# Altium PCB NE-CurrentSense-V3.PcbDoc
Units mm, origin at the board's own origin, x right, y up, seen from the top; angles counter-clockwise.
Board outline 98.25 x 80.25 mm, 2 copper layers (Top Layer, Bottom Layer); 45 components, 21 nets, 116 pads, 681 vias.
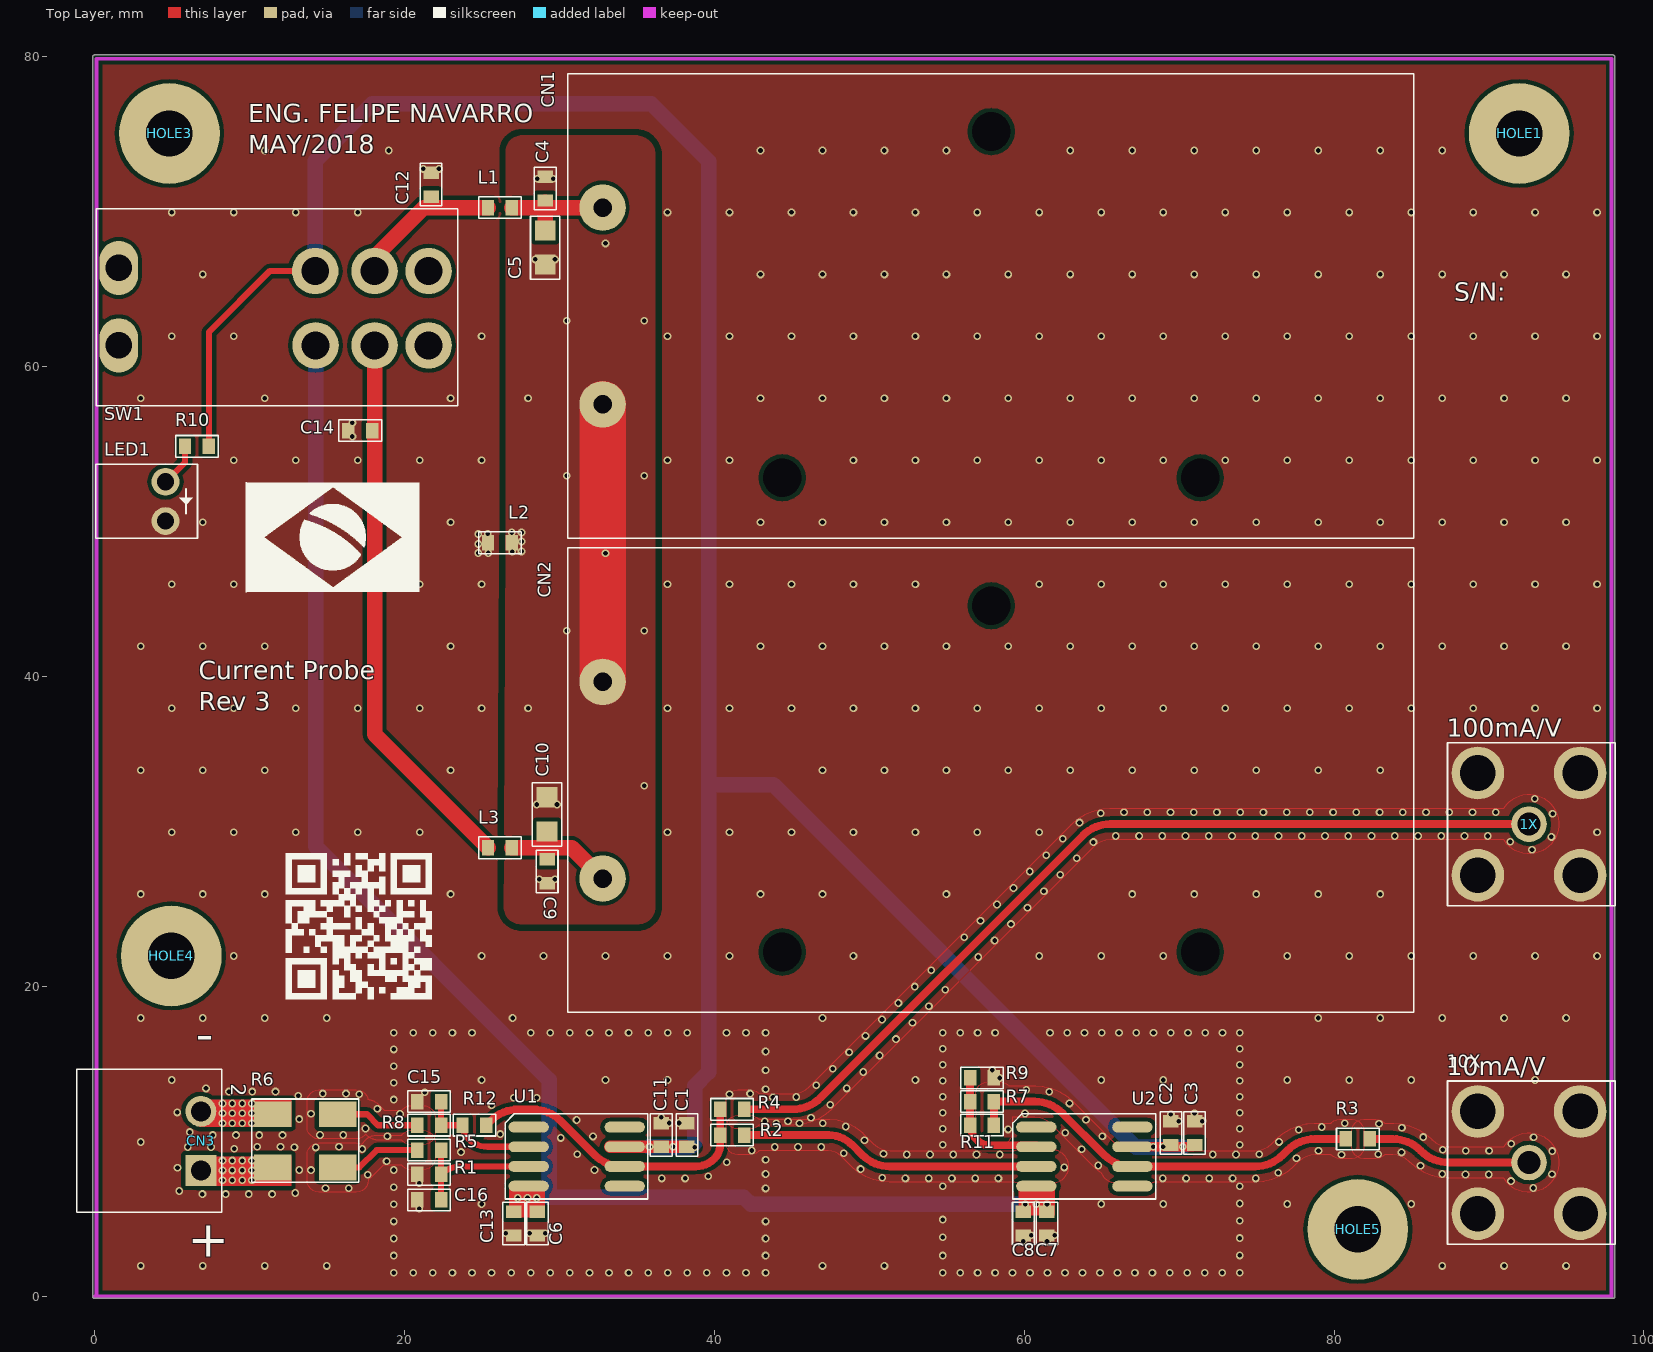
[diagram p0: Top Layer view]
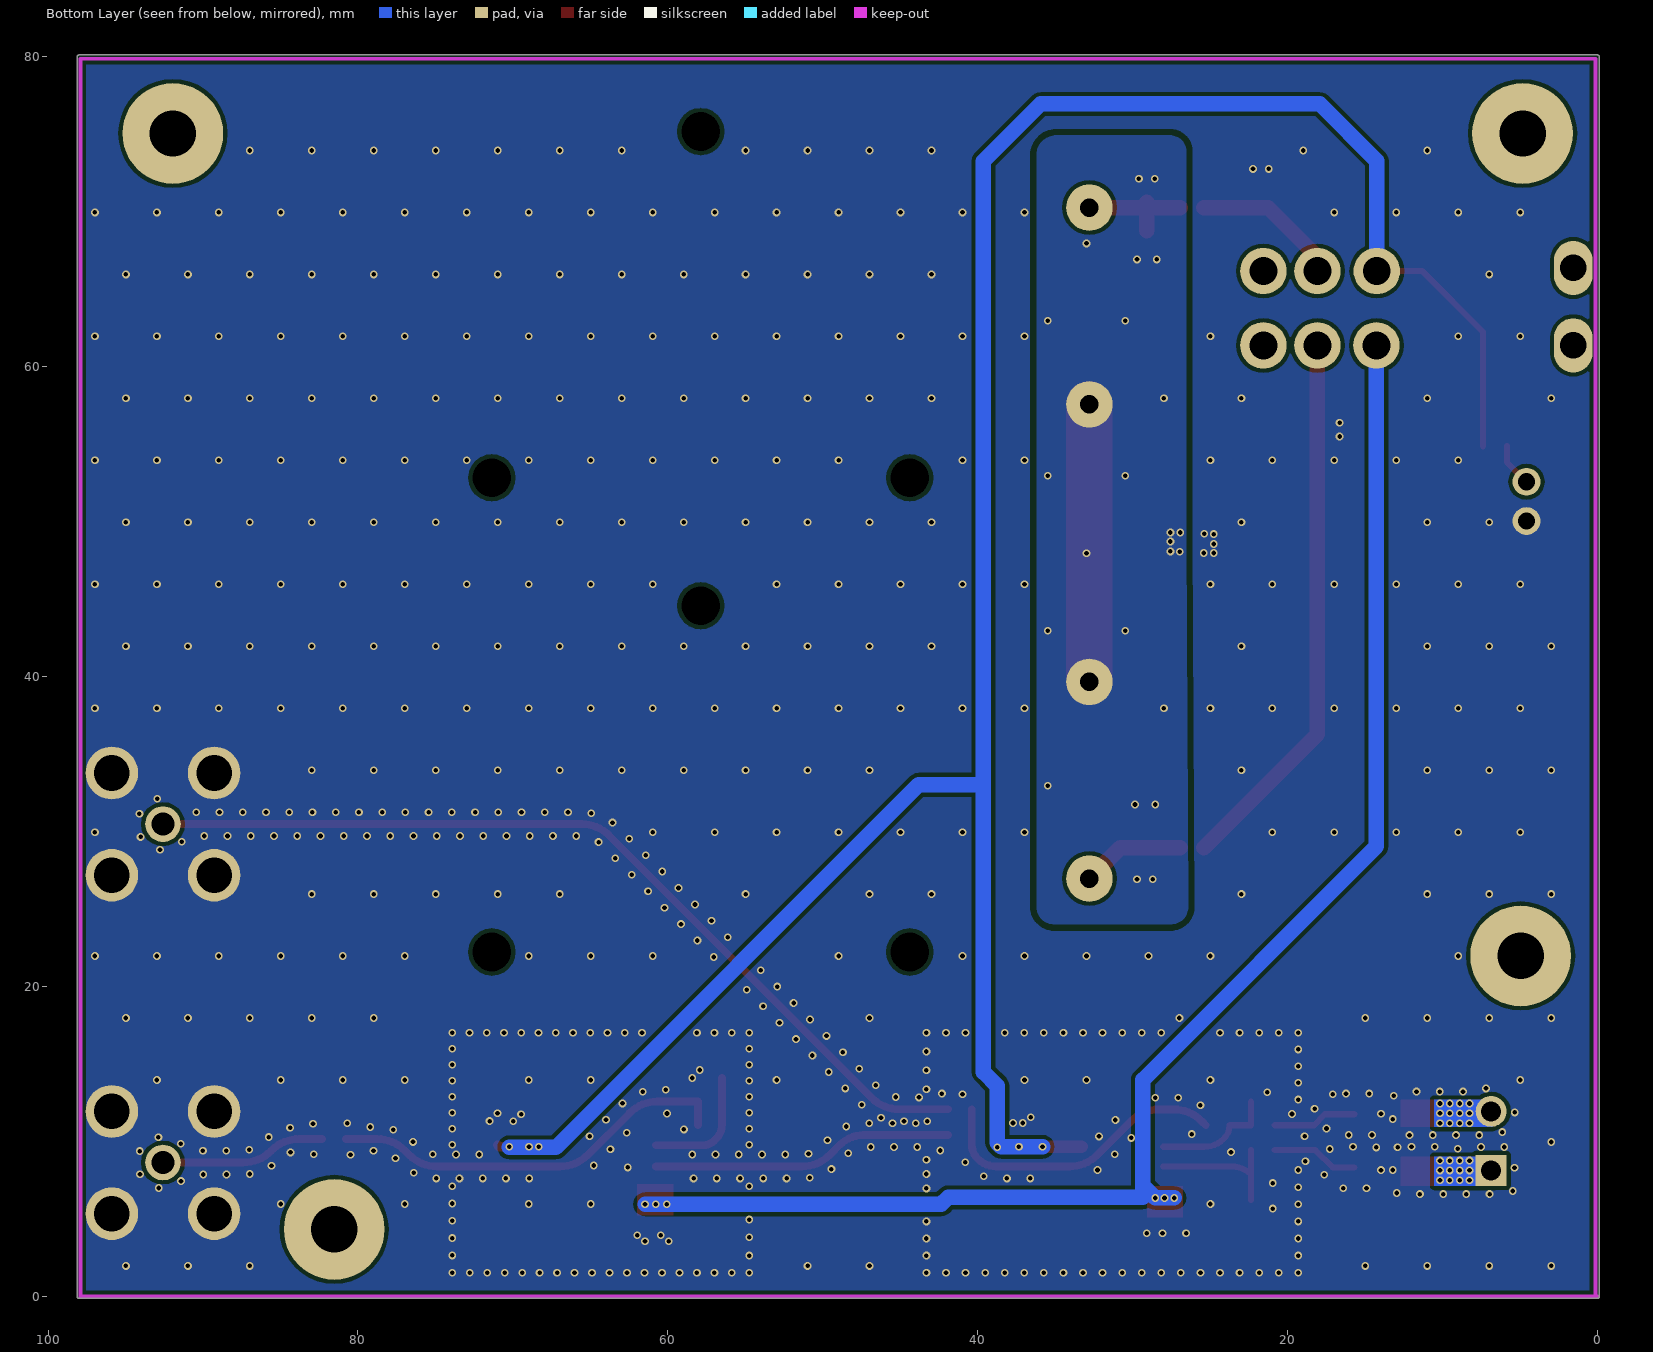
[diagram p1: Bottom Layer view, seen from below]
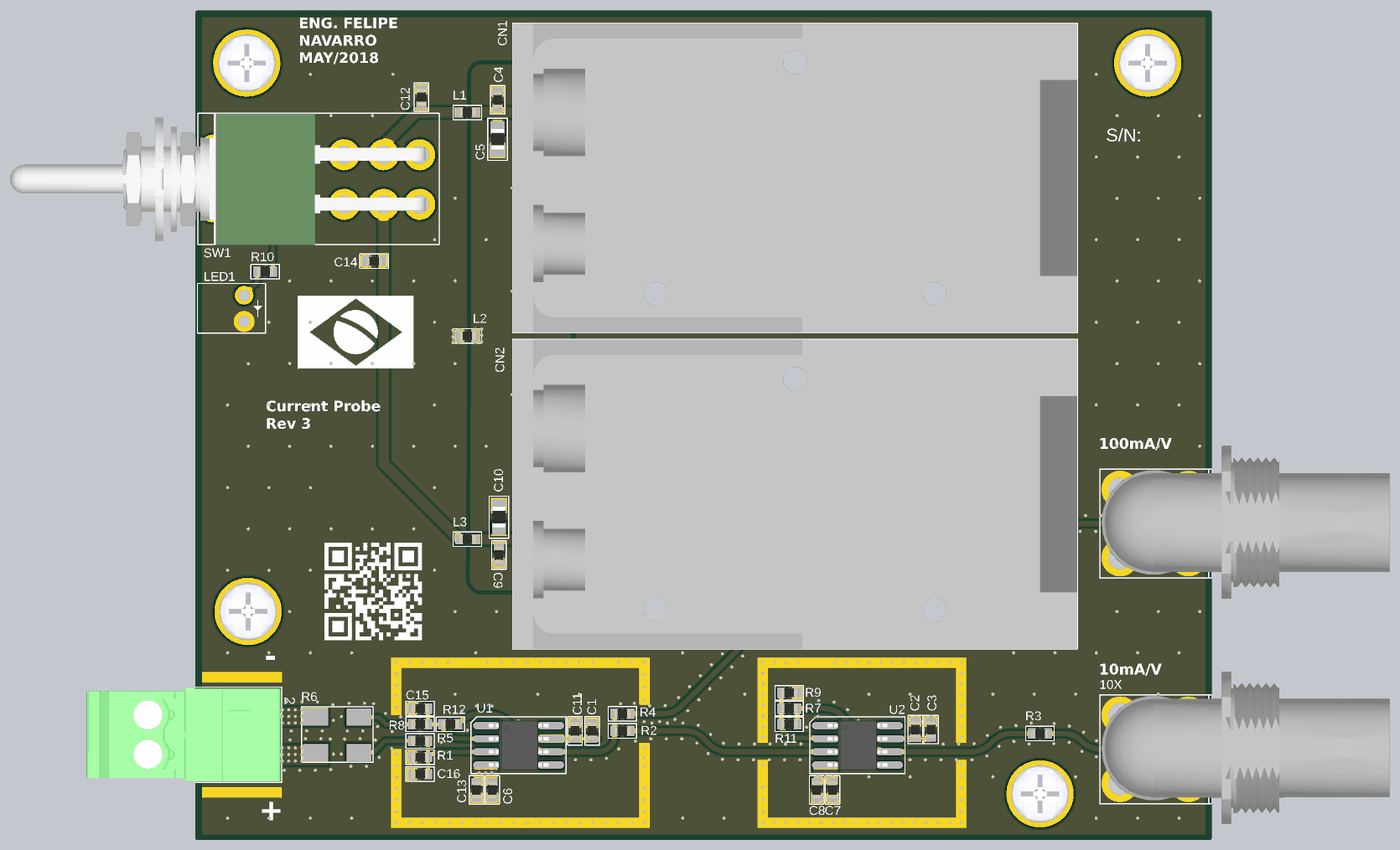
[diagram p2: 3D render of the assembled board from above, using the file's embedded part models]

## Layer stack, top to bottom
Top Solder: solder mask 0.0102, Solder Resist, Dk 3.5
Top Layer: signal copper 0.0356
Dielectric 1: dielectric 0.32, FR-4, Dk 4.8
Bottom Layer: signal copper 0.0356
Bottom Solder: solder mask 0.0102, Solder Resist, Dk 3.5

## Board outline
-0.127,0 ccw(c0,0) 0,-0.127 97.917,-0.127 ccw(c97.917,0) 97.958,-0.12 97.959,-0.12 ccw(c98,0) 98.127,0 98.127,80 ccw(c98,80) 98,80.127 0,80.127 ccw(c0,80) -0.127,80

## Design rules (kind name [scope] priority, off if disabled: settings)
Clearance [InNet('GND') vs InNet('NetC4_1')] p1: gap=0.4 ignorepadtopadclearanceinfootprint=FALSE
Clearance Clearance_1 [All] p2: gap=0.254 ignorepadtopadclearanceinfootprint=FALSE except(0: Arc-Hole Track-Hole SMDPad-Hole THPad-Hole Via-Hole Fill-Hole Poly-Hole Region-Hole Text-Hole)
PolygonConnect [All] p1: connectstyle=Direct reliefconductorwidth=0.254 reliefentries=4 polygonreliefangle="90 Angle" airgapwidth=0.254
RoutingVias [All] p1: holewidth=0.711 width=1.27 viastyle="Through Hole" minholewidth=0.711 minwidth=1.27 maxholewidth=0.711 maxwidth=1.27
SolderMaskExpansion [All] p1: expansion=0.102
Width [All] p1: maxlimit=4 minlimit=0.254 preferedwidth=0.254
30 further rules are at their usual default settings.

## Classes and differential pairs
component class NE-CurrentSense-V3: 1X 10X C1 C4 C5 C6 C9 C10 C11 C12 C13 C14 C15 C16 CN1 CN2 CN3 CN#1 HOLE1 HOLE3 HOLE4 HOLE5 L1 L2 L3 LED1 R1 R2 R3 R5 R6 R7 R8 R9 R10 R11 R12 SW1 U1 U2

## Components (designator, comment, footprint, x,y, rotation, side; value= is the part's Value field where it differs from the comment)
1X "Conn BNC" "CONN BNC-JACK-TE-5-1634556-0" 92.583,30.48 r270 top value="Jack BNC"
10X "Conn BNC" "CONN BNC-JACK-TE-5-1634556-0" 92.583,8.636 r270 top value="Jack BNC"
C1 "Capacitor Cerâmico" CC0603 38.227,10.414 r270 top value=100nF
C2 "Capacitor Cerâmico" CC0603 69.469,10.541 r270 top value=100nF
C3 "Capacitor Cerâmico" CC0603 70.993,10.541 r270 top value=1uF
C4 "Capacitor Cerâmico" CC0603 29.083,71.501 r270 top value=1uF
C5 "Capacitor Cerâmico" CC0805 29.083,67.691 r90 top value=10uF
C6 "Capacitor Cerâmico" CC0603 28.575,4.699 r270 top value=100nF
C7 "Capacitor Cerâmico" CC0603 61.468,4.699 r270 top value=100nF
C8 "Capacitor Cerâmico" CC0603 59.944,4.699 r270 top value=1uF
C9 "Capacitor Cerâmico" CC0603 29.21,27.432 r270 top value=1uF
C10 "Capacitor Cerâmico" CC0805 29.21,31.115 r90 top value=10uF
C11 "Capacitor Cerâmico" CC0603 36.576,10.414 r270 top value=1uF
C12 "Capacitor Cerâmico" CC0603 21.717,71.755 r270 top value=1uF
C13 "Capacitor Cerâmico" CC0603 27.051,4.699 r270 top value=1uF
C14 "Capacitor Cerâmico" CC0603 17.145,55.88 r180 top value=1uF
C15 "Capacitor Cerâmico" CC0603 21.59,12.573 r0 top value=10pF
C16 "Capacitor Cerâmico" CC0603 21.59,6.223 r0 top value=10pF
CN1 "Holder" BATTHOLDER-9V-BH9V-PC-ND 52.07,64.008 r180 top value="Holder 9V BAT"
CN2 "Holder" BATTHOLDER-9V-BH9V-PC-ND 52.07,33.401 r180 top value="Holder 9V BAT"
CN3 "Block" "CONN BLOCK2 RCPT/H" 6.858,8.128 r180 top value="Receptáculo - 2 Polos"
CN#1 "Conector Externo" N/A 121.666,42.799 r90 top value="Plug - 2 Polos"
HOLE1 "Furo de Fixação" Furo_M3 91.948,75.057 r0 top value=M3
HOLE3 "Furo de Fixação" Furo_M3 4.826,75.057 r0 top value=M3
HOLE4 "Furo de Fixação" Furo_M3 4.953,21.971 r0 top value=M3
HOLE5 "Furo de Fixação" Furo_M3 81.534,4.318 r0 top value=M3
L1 "Bead" CC0603 26.162,70.273 r0 top value=100R@100MHz
L2 "Bead" CC0603 26.162,48.641 r0 top value=100R@100MHz
L3 "Bead" CC0603 26.162,28.956 r0 top value=100R@100MHz
LED1 "LED" LED-INDIC 4.572,51.308 r270 top value=Verde
R1 "Resistor" CC0603 21.59,7.874 r180 top value=15K
R2 "Resistor" CC0603 41.148,10.409 r0 top value=100R
R3 "Resistor" CC0603 81.534,10.16 r0 top value=49R9
R4 "Resistor" CC0603 41.148,12.071 r0 top value=49R9
R5 "Resistor" CC0603 21.59,9.441 r0 top value=1K5
R6 "Resistor" "CC2516 - Wide Vishay" 13.589,10.033 r0 top value="1R 1W"
R7 "Resistor Open" CC0603 57.277,12.573 r0 top value=OPEN
R8 "Resistor" CC0603 21.59,11.049 r0 top value=1K5
R9 "Resistor" CC0603 57.277,14.097 r180 top value=470R
R10 "Resistor" CC0603 6.604,54.864 r0 top value=470R
R11 "Resistor" CC0603 57.277,11.055 r0 top value=4K7
R12 "Resistor" CC0603 24.511,11.049 r0 top value=15K
SW1 "M2022SS1W40" "SWITCH TOGGLE DPDT 6A 125V" 11.557,63.881 r0 top value=ON-ON
U1 "OPA211" SOIC-8N 31.115,9.017 r0 top
U2 "OPA211" SOIC-8N 63.881,9.017 r0 top

## Footprints (in the part's own frame and the unit in brackets; to place one, negate y for a bottom-side part, rotate by r counter-clockwise, add the part's x,y. Pads: shape width x height; smd on the part's side, far side on the other; paste and mask are expansions set on the pad)
BATTHOLDER-9V-BH9V-PC-ND [mm]
  round 1.524 hole 2.5 unplated: 0(-19.285,11.175) 0(-5.805,-11.175) 0(7.685,11.175)
  round 3 hole 1.2: 1(19.285,6.435) 2(19.285,-6.265)
  silkscreen extent -33.08,-14.91 21.53,15.06, body extent -33.08,-14.91 21.53,15.06, height 20.7
CC0603 [mm] "Chip Resistor, 2-Leads, Body 1,6x0,8mm, IPC Medium Density"
  rect 0.8x1 smd: 1(-0.77,0) 2(0.77,0)
  silkscreen extent -1.38,-0.7 1.38,0.7, body extent -0.8,-0.42 0.8,0.43, height 0.45
CC0805 [mm] "Chip Resistor, 2-Leads, Body 2,0x1,2mm, IPC Medium Density"
  rect 1.3x1.35 smd: 1(-1.1,0) 2(1.1,0)
  silkscreen extent -2.05,-0.95 2.02,0.95, body extent -1,-0.62 1,0.63, height 0.6
"CC2516 - Wide Vishay" [mm]
  rect 2.41x1.65 smd: 1(-2.095,1.715) 2(2.095,1.715) 3(-2.095,-1.715) 4(2.095,-1.715)
  silkscreen extent -3.46,-2.67 3.45,2.71, body extent -3.18,-2.03 3.18,2.03, height 1.27
"CONN BLOCK2 RCPT/H" [mm] "Conector Shrouded Block. Macho, 2 Pin, Horizontal"
  rect 2x2 hole 1.3: 1(0,0)
  round 2 hole 1.3: 2(0,-3.81)
  silkscreen extent -1.35,-6.52 8,2.7, body extent -1.34,-6.42 17.48,2.59, height 8.6
"CONN BNC-JACK-TE-5-1634556-0" [mm]
  round 2.3 hole 1.5: 1(0,0)
  round 3.4 hole 2.3: 2(-3.3,3.3) 2(-3.3,-3.3) 2(3.3,3.3) 2(3.3,-3.3)
  silkscreen extent -5.26,-5.26 5.28,5.55, body extent -7.51,-5.09 7.29,22.74, height 11.71
Furo_M3 [mm] "Furo metalizado para parafuso M3"
  round 6.5 hole 3 unplated paste+0: X(0,0)
  body extent -2.8,-2.8 2.8,2.8, height 2.38
LED-INDIC [mm]
  round 1.8 hole 1.1: 1(-1.27,0) 2(1.27,0)
  silkscreen extent -2.4,-4.51 2.38,2.07, body extent -2.3,-6.81 2.3,1.95, height 7.3
N/A [mm]
SOIC-8N [mm] "SOIC, 8-Leads, Body 4.9x3.9mm, Pitch 1.27mm, IPC Medium Density"
  oval 2.6x0.7 smd: 1(-3.1,1.905) 2(-3.1,0.635) 3(-3.1,-0.635) 4(-3.1,-1.905) 5(3.1,-1.905) 6(3.1,-0.635) 7(3.1,0.635) 8(3.1,1.905)
  silkscreen extent -4.61,-2.73 4.6,2.76, body extent -2.9,-2.4 2.9,2.4, height 1.75
"SWITCH TOGGLE DPDT 6A 125V" [mm] "Chave Seletora SPDT para SubPanel com angulo lateral. Thru-Hole"
  round 3 hole 1.8: 1(2.7,-2.5) 2(6.51,-2.5) 3(10,-2.5) 4(2.681,2.3) 5(6.51,2.3) 6(10,2.3)
  oval 2.5x3.5 hole 1.7: 7(-10,-2.5) 7(-10,2.5)
  silkscreen extent -11.45,-6.39 11.88,6.31, body extent -29.62,-6.42 10.58,6.28, height 13.5

## Part data
1X 10X: "Conector BNC", Supplier Part Number 1=A97570-ND, ChinesePrice=0,00000, Chinês=----, ComponentLink1Description=Datasheet, ComponentLink1URL=D:\Tecnoclade\Datasheet\!DataMissing.pdf, Supplier 1=Digi-Key
C1 C2 C6 C7: library part "Cap 100nF 25V 0603 X7R", "Capacitor (Semiconductor SIM Model)", Supplier Part Number 1=490-1524-1-ND, Tolerância=±10%, ChinesePrice=0,00246, Chinês=Local, ComponentLink1Description=Datasheet, ComponentLink1URL=D:\Tecnoclade\Datasheet\!DataMissing.pdf, Corrente=*A, Obs=X7R, Potência=*W, Supplier 1=Digi-Key, Tensão=25V
C3 C4 C8 C9 C11 C12 C13 C14: library part "Cap 1uF 50V 0603 X5R", "Capacitor (Semiconductor SIM Model)", Supplier Part Number 1=587-2400-1-ND, Tolerância=±10%, ChinesePrice=0,01100, Chinês=Local, ComponentLink1Description=Datasheet, ComponentLink1URL=D:\Tecnoclade\Datasheet\!DataMissing.pdf, Corrente=*A, Obs=X5R, Potência=*W, Supplier 1=Digi-Key, Tensão=50V
C5 C10: library part "Cap 10uF 25V 0805 X5R", "Capacitor (Semiconductor SIM Model)", Supplier Part Number 1=587-2985-1-ND, Tolerância=±10%, ChinesePrice=0,02620, Chinês=Local, ComponentLink1Description=Datasheet, ComponentLink1URL=D:\Tecnoclade\Datasheet\!DataMissing.pdf, Corrente=*A, Obs=X5R, Potência=*W, Supplier 1=Digi-Key, Tensão=25V
C15 C16: library part "Cap 10pF 50V 0603 NP0 5%", "Capacitor (Semiconductor SIM Model)", Supplier Part Number 1=445-1269-1-ND, Tolerância=±5%, ChinesePrice=0,00180, Chinês=Local, ComponentLink1Description=Datasheet, ComponentLink1URL=D:\Tecnoclade\Datasheet\!DataMissing.pdf, Corrente=*A, Obs=NP0, Potência=*W, Supplier 1=Digi-Key, Tensão=50V
CN1 CN2: library part "BattHolder 9V", Supplier Part Number 1=BH9V-PC-ND, ChinesePrice=0,00000, Chinês=----, ComponentLink1Description=Datasheet, ComponentLink1URL=D:\Tecnoclade\Datasheet\!DataMissing.pdf, Corrente=*A, Supplier 1=Digi-Key, Tensão=*V
CN3: library part "SHRD Block 2P RCPT-H P3.81mm", "Conector Shrouded Block", Supplier Part Number 1=ED2808-ND, ChinesePrice=0,00000, Chinês=----, ComponentLink1Description=Datasheet, ComponentLink1URL=D:\Tecnoclade\Datasheet\!DataMissing.pdf, Corrente=10A, Supplier 1=Digi-Key, Tensão=300V
CN#1: library part "Plug Block 2P 3.81mm", "Conector Plug", Supplier Part Number 1=ED2875-ND, Tolerância="16~26 AWG", ChinesePrice=0,00000, Chinês=----, ComponentLink1Description=Datasheet, ComponentLink1URL=D:\Tecnoclade\Datasheet\!DataMissing.pdf, Corrente=10A, Supplier 1=Digi-Key, Tensão=300V
HOLE1 HOLE3 HOLE4 HOLE5: library part Parafuso, "Furo para parafuso", Supplier Part Number 1=--Del, ChinesePrice=0,00000, Chinês=----, ComponentLink1Description=Datasheet, ComponentLink1URL=D:\Tecnoclade\Datasheet\!DataMissing.pdf, Supplier 1=Digi-Key
L1 L2 L3: library part "Bd 100R@100MHz 0603 2A", Supplier Part Number 1=445-2984-1-ND, Tolerância=±25%, ChinesePrice=0,00000, Chinês=----, ComponentLink1Description=Datasheet, ComponentLink1URL=D:\Tecnoclade\Datasheet\!DataMissing.pdf, Corrente=2A, Obs="Ferrite (0R04)", Substituição=00/00/0000, Supplier 1=Digi-Key
LED1: library part LED2, "Typical RED, GREEN, YELLOW, AMBER GaAs LED", Supplier Part Number 1=754-1297-ND, ChinesePrice=0,00000, Chinês=----, Supplier 1=Digi-Key, VertSimCode="} XXXXX {"
R1 R12: library part "Res 15K 0.1% 0603 1/10W", Supplier Part Number 1=P15KDBCT-ND, Tolerância=±0.1%, ChinesePrice=0,00000, Chinês=-----, ComponentLink1Description=Datasheet, ComponentLink1URL=D:\Tecnoclade\Datasheet\!DataMissing.pdf, Corrente=*A, Obs=±25ppm/ºC, Potência=1/10W, Supplier 1=Digi-Key, Tensão=*V
R2: library part "Res 100R 5% 0603 1/10W", Supplier Part Number 1=RMCF0603JT100RCT-ND, Tolerância=±5%, ChinesePrice=0,00080, Chinês=Local, ComponentLink1Description=Datasheet, ComponentLink1URL=D:\Tecnoclade\Datasheet\!DataMissing.pdf, Corrente=*A, Potência=1/10W, Supplier 1=Digi-Key, Tensão=*V
R3 R4: library part "Res 49R9 1% 0603 1/10W", Supplier Part Number 1=P49.9HCT-ND, Tolerância=±1%, ChinesePrice=0,00089, Chinês=Local, ComponentLink1Description=Datasheet, ComponentLink1URL=D:\Tecnoclade\Datasheet\!DataMissing.pdf, Corrente=*A, Potência=1/10W, Supplier 1=Digi-Key, Tensão=*V
R5 R8: library part "Res 1K5 1% 0603 1/10W", Supplier Part Number 1=311-1.50KHRCT-ND, Tolerância=±1%, ChinesePrice=0,00000, Chinês=----, ComponentLink1Description=Datasheet, ComponentLink1URL=D:\Tecnoclade\Datasheet\!DataMissing.pdf, Corrente=*A, Obs=±100ppm/ºC, Potência=1/10W, Supplier 1=Digi-Key, Tensão=*V
R6: library part "Res 1R 0.1% CC2516-Wide-4W 1W", Supplier Part Number 1=Y1606-1.0B-ND, Tolerância=±*%, ChinesePrice=0,00000, Chinês=----, ComponentLink1Description=Datasheet, ComponentLink1URL=D:\Tecnoclade\Datasheet\!DataMissing.pdf, Corrente=*A, Potência=1/10W, Supplier 1=Digi-Key, Tensão=*V
R7: library part "Res Open 0603", "Resistor", Supplier Part Number 1=--Del, Tolerância=±*%, ChinesePrice=0,00000, Chinês=----, ComponentLink1Description=Datasheet, ComponentLink1URL=D:\Tecnoclade\Datasheet\!DataMissing.pdf, Corrente=*A, Potência=*W, Supplier 1=Digi-Key, Tensão=*V
R9 R10: library part "Res 470R 5% 0603 1/10W", Supplier Part Number 1=RMCF0603JT470RCT-ND, Tolerância=±5%, ChinesePrice=0,00000, Chinês=----, ComponentLink1Description=Datasheet, ComponentLink1URL=D:\Tecnoclade\Datasheet\!DataMissing.pdf, Corrente=*A, Obs=±200ppm/ºC, Potência=1/10W, Supplier 1=Digi-Key, Tensão=*V
R11: library part "Res 4K7 1% 0603 1/10W", Supplier Part Number 1=RMCF0603FT4K70CT-ND, Tolerância=±1%, ChinesePrice=0,00000, Chinês=----, ComponentLink1Description=Datasheet, ComponentLink1URL=D:\Tecnoclade\Datasheet\!DataMissing.pdf, Corrente=*A, Obs=±100ppm/ºC, Potência=1/10W, Supplier 1=Digi-Key, Tensão=*V
SW1: library part SW-DPDT, "Double-Pole, Double-Throw Switch", Supplier Part Number 1=M2022SS1W40-ND, ChinesePrice=1,64000, Chinês=Local, ComponentLink1Description=Datasheet, ComponentLink1URL=D:\Tecnoclade\Datasheet\, Corrente=6A, Supplier 1=Digi-Key, Tensão=125V
U1 U2: "Operational Amplifier", Supplier Part Number 1=296-23403-1-ND, ChinesePrice=0,00000, Chinês=----, ComponentLink1Description=Datasheet, ComponentLink1URL=D:\Tecnoclade\Datasheet\, Supplier 1=Digi-Key

## Via types
v1: diameter 0.5, hole 0.3, Top Layer to Bottom Layer, tented both sides, 681 vias

## Nets (pads, with @x,y where several pads share a name; then routed paths per layer and width w, separated by ;. In a path a pad name is that pad's centre, name@x,y a point inside that pad or via, vN(x,y) a via of type N, cw(c..) or ccw(c..) an arc to the next point about the centre after c; other vN are vias at no path point)
9V_SW: C1.2 C2.2 C3.2 C11.2 R10.2 SW1.4 U1.7 U2.7 | length 167.5
  Top Layer w0.4: R10.2 7.374,62.238 11.317,66.181 SW1.4
  Top Layer w0.6: U2.7 70.874,9.652 C3.2
  Top Layer w0.8: U1.7@33.274,9.652 C1.2@38.227,9.652
  Bottom Layer w1: SW1.4 14.238,73.293 17.907,76.962 35.941,76.962 39.624,73.279 39.624,33.02 ; v1(35.814,9.652) 38.481,9.652 38.735,9.906 38.735,13.589 39.624,14.478 39.624,33.02 ; v1@70.231,9.618 67.217,9.618 43.815,33.02 39.624,33.02
  other v1: 38.735,9.618 37.338,9.652 68.326,9.652 68.961,9.652 70.231,9.652
+9V: C12.2 L1.1 SW1.5 | length 9.6
  Top Layer w1: SW1.5 18.067,67.089 21.251,70.273 L1.1
-9V: C14.1 L3.1 SW1.2 | length 35.5
  Top Layer w1: SW1.2 18.067,36.281 L3.1
-9VSW: C6.1 C7.1 C8.1 C13.1 SW1.1 U1.4 U2.4 | length 95.9
  Bottom Layer w1: SW1.1 14.257,29.053 29.337,13.973 29.337,6.388 41.909,6.388 42.354,5.943 v1(61.468,5.943) ; v1(27.305,6.35) v1(27.94,6.35) v1(28.539,6.35) 29.337,7.148
  other v1: 60.071,5.943 60.77,5.943
GND: 1X.2 10X.2 C1.1 C2.1 C3.1 C6.2 C7.2 C8.2 C11.1 C12.1 C13.2 C14.2 C15.1 C16.1 L2.1 LED1.2 R1.2 R9.1
  other v1: 19.304,1.524 20.567,1.524 21.831,1.524 23.094,1.524 24.357,1.524 25.621,1.524 26.884,1.524 28.147,1.524 29.411,1.524 30.674,1.524 31.937,1.524 33.2,1.524 34.464,1.524 35.727,1.524 36.99,1.524 38.254,1.524 39.517,1.524 39.517,1.524 40.78,1.524 42.044,1.524 43.307,1.524 54.737,1.524 55.865,1.524 56.993,1.524 58.121,1.524 59.249,1.524 60.377,1.524 61.505,1.524 62.633,1.524 63.761,1.524 64.89,1.524 66.018,1.524 67.146,1.524 68.274,1.524 69.402,1.524 70.53,1.524 71.658,1.524 72.786,1.524 73.914,1.524 2.977,1.963 6.977,1.963 10.977,1.963 14.977,1.963 46.977,1.963 50.977,1.963 86.977,1.963 90.977,1.963 94.977,1.963 19.304,2.629 43.307,2.629 54.737,2.629 73.914,2.642 59.944,3.556 61.468,3.556 19.304,3.733 43.307,3.733 73.914,3.759 54.737,3.81 60.452,3.937 61.976,3.937 26.546,4.064 28.067,4.064 29.083,4.064 19.304,4.838 43.307,4.838 73.914,4.877 54.737,4.953 20.955,5.664 19.304,5.943 24.977,5.963 64.977,5.963 68.977,5.963 76.977,5.963 84.977,5.963 73.914,5.994 6.955,6.598 8.455,6.598 9.955,6.598 11.455,6.598 12.953,6.675 5.469,6.803 43.307,6.967 14.905,6.979 16.405,6.979 92.855,6.994 19.304,7.047 54.737,7.112 73.914,7.112 20.955,7.31 91.423,7.439 36.612,7.613 38.112,7.613 52.333,7.613 53.833,7.613 55.333,7.613 56.833,7.613 58.333,7.613 68.95,7.613 70.45,7.613 71.95,7.613 73.45,7.613 74.95,7.612 50.834,7.655 39.606,7.757 17.631,7.845 88.485,7.867 89.985,7.867 94.069,7.875 43.307,7.892 86.985,7.896 76.404,7.98 13.214,8.152 13.965,8.148 19.304,8.152 32.262,8.157 49.442,8.213 5.344,8.298 62.592,8.322 85.581,8.423 64.774,8.448 40.801,8.662 18.846,8.723 43.307,8.817 77.576,8.916 52.419,9.151 53.919,9.151 55.419,9.151 56.919,9.151 58.419,9.151 72.168,9.151 73.668,9.151 80.479,9.146 31.151,9.165 75.168,9.177 82.86,9.177 50.92,9.208 48.346,9.238 84.356,9.289 23.647,9.311 94.078,9.375 78.999,9.391 88.507,9.405 90.007,9.405 42.418,9.415 87.008,9.456 63.706,9.501 9.006,9.531 17.271,9.515 12.896,9.618 14.278,9.615 6.01,9.642 7.51,9.642 10.501,9.657 12.001,9.657 15.777,9.657 43.901,9.64 45.401,9.64 46.901,9.64 54.737,9.779 73.914,9.779 91.439,9.852 2.977,9.963 76.442,9.968 49.692,10.069 30.09,10.225 85.755,10.279 92.878,10.275 32.168,10.322 18.897,10.331 65.047,10.335 7.626,10.408 9.126,10.408 10.626,10.408 12.126,10.408 14.547,10.409 16.047,10.409 26.18,10.472 62.646,10.562 6.139,10.602 58.961,10.776 77.718,10.757 54.737,10.813 73.914,10.813 17.485,10.837 84.378,10.875 79.208,10.929 48.484,10.959 82.901,11.135 37.084,11.184 37.719,11.184 44,11.178 45.5,11.178 47,11.178 80.688,11.174 43.255,11.302 44.755,11.302 69.977,11.303 71.501,11.311 31.107,11.383 63.986,11.396 13.214,11.441 46.238,11.525 36.576,11.557 19.712,11.767 69.469,11.748 13.965,11.792 60.053,11.804 70.993,11.811 54.737,11.847 73.914,11.847 5.34,11.872 18.25,12.102 25.621,12.341 47.484,12.361 62.923,12.454 19.304,12.7 27.044,12.815 28.544,12.819 43.788,12.84 45.288,12.862 54.737,12.881 73.914,12.881 13.146,12.939 17.086,13.048 40.975,13.046 14.722,13.087 16.222,13.087 42.308,13.085 21.311,13.172 8.672,13.214 10.172,13.214 11.672,13.214 61.623,13.202 60.129,13.342 43.307,13.371 7.186,13.422 48.544,13.421 46.577,13.629 19.304,13.779 54.737,13.916 73.914,13.916 4.977,13.963 24.977,13.963 32.977,13.963 36.977,13.963 52.977,13.963 64.977,13.963 68.977,13.963 76.977,13.963 80.977,13.963 84.977,13.963 92.977,13.963 58.42,14.097 49.605,14.482 43.307,14.587 57.943,14.605 47.638,14.689 19.304,14.859 54.737,14.95 73.914,14.95 50.666,15.543 48.699,15.75 43.307,15.802 19.304,15.938 54.737,15.984 73.914,15.984 51.726,16.603 49.759,16.811 19.304,17.018 20.567,17.018 21.831,17.018 23.094,17.018 24.357,17.018 28.147,17.018 29.411,17.018 30.674,17.018 31.937,17.018 33.2,17.018 34.464,17.018 35.727,17.018 36.99,17.018 38.254,17.018 40.78,17.018 42.044,17.018 43.307,17.018 54.737,17.018 55.865,17.018 56.993,17.018 58.121,17.018 61.665,17.018 62.778,17.018 63.892,17.018 65.006,17.018 66.119,17.018 67.233,17.018 68.346,17.018 69.46,17.018 70.573,17.018 71.687,17.018 72.8,17.018 73.914,17.018 52.787,17.664 50.82,17.871 2.977,17.963 6.977,17.963 10.977,17.963 14.977,17.963 26.977,17.963 46.977,17.963 78.977,17.963 82.977,17.963 86.977,17.963 90.977,17.963 94.977,17.963 53.848,18.725 51.881,18.932 54.908,19.785 52.941,19.993 54.002,21.053 57.03,21.907 8.977,21.963 24.977,21.963 28.977,21.963 32.977,21.963 36.977,21.963 40.977,21.963 48.977,21.963 60.977,21.963 64.977,21.963 68.977,21.963 76.977,21.963 80.977,21.963 84.977,21.963 88.977,21.963 92.977,21.963 96.977,21.963 58.09,22.967 56.123,23.175 59.151,24.028 57.184,24.235 60.212,25.089 58.245,25.296 2.977,25.963 6.977,25.963 10.977,25.963 22.977,25.963 42.977,25.963 46.977,25.963 54.977,25.963 66.977,25.963 70.977,25.963 74.977,25.963 78.977,25.963 82.977,25.963 61.272,26.149 59.305,26.356 62.333,27.21 60.366,27.417 63.394,28.271 61.427,28.478 92.778,28.828 64.467,29.318 91.367,29.336 62.487,29.538 94.03,29.655 65.915,29.711 67.415,29.711 68.915,29.711 70.415,29.711 71.915,29.711 73.415,29.711 74.915,29.711 76.415,29.711 77.915,29.711 79.415,29.711 80.915,29.711 82.415,29.711 83.915,29.711 85.415,29.711 86.915,29.711 88.415,29.711 89.915,29.711 4.977,29.963 8.977,29.963 12.977,29.963 16.977,29.963 20.977,29.963 36.977,29.963 40.977,29.963 44.977,29.963 48.977,29.963 52.977,29.963 56.977,29.963 60.977,29.963 96.977,29.963 63.569,30.578 94.105,31.153 64.94,31.187 66.438,31.249 67.938,31.249 69.438,31.249 70.938,31.249 72.438,31.249 73.938,31.249 75.438,31.249 76.938,31.249 78.438,31.249 79.938,31.249 81.438,31.249 82.938,31.249 84.438,31.249 85.938,31.249 87.438,31.249 88.938,31.249 90.438,31.249 92.95,32.11 2.977,33.963 6.977,33.963 10.977,33.963 22.977,33.963 46.977,33.963 50.977,33.963 54.977,33.963 58.977,33.963 62.977,33.963 66.977,33.963 70.977,33.963 74.977,33.963 78.977,33.963 82.977,33.963 4.977,37.963 8.977,37.963 12.977,37.963 16.977,37.963 20.977,37.963 24.977,37.963 36.977,37.963 40.977,37.963 44.977,37.963 48.977,37.963 52.977,37.963 56.977,37.963 60.977,37.963 64.977,37.963 68.977,37.963 72.977,37.963 76.977,37.963 80.977,37.963 84.977,37.963 88.977,37.963 92.977,37.963 96.977,37.963 2.977,41.963 6.977,41.963 10.977,41.963 22.977,41.963 42.977,41.963 46.977,41.963 50.977,41.963 54.977,41.963 58.977,41.963 62.977,41.963 66.977,41.963 70.977,41.963 74.977,41.963 78.977,41.963 82.977,41.963 86.977,41.963 90.977,41.963 94.977,41.963 4.977,45.963 8.977,45.963 12.977,45.963 16.977,45.963 20.977,45.963 24.977,45.963 36.977,45.963 40.977,45.963 44.977,45.963 48.977,45.963 52.977,45.963 60.977,45.963 64.977,45.963 68.977,45.963 72.977,45.963 76.977,45.963 80.977,45.963 84.977,45.963 88.977,45.963 92.977,45.963 96.977,45.963 24.765,47.981 25.404,47.981 24.765,48.565 24.765,49.2 25.375,49.225 6.977,49.963 10.977,49.963 22.977,49.963 42.977,49.963 46.977,49.963 50.977,49.963 54.977,49.963 58.977,49.963 62.977,49.963 66.977,49.963 70.977,49.963 74.977,49.963 78.977,49.963 82.977,49.963 86.977,49.963 90.977,49.963 94.977,49.963 8.977,53.963 12.977,53.963 16.977,53.963 20.977,53.963 24.977,53.963 36.977,53.963 40.977,53.963 48.977,53.963 52.977,53.963 56.977,53.963 60.977,53.963 64.977,53.963 68.977,53.963 72.977,53.963 76.977,53.963 80.977,53.963 84.977,53.963 88.977,53.963 92.977,53.963 96.977,53.963 16.637,55.499 16.637,56.388 2.977,57.963 10.977,57.963 22.977,57.963 42.977,57.963 46.977,57.963 50.977,57.963 54.977,57.963 58.977,57.963 62.977,57.963 66.977,57.963 70.977,57.963 74.977,57.963 78.977,57.963 82.977,57.963 86.977,57.963 90.977,57.963 94.977,57.963 4.977,61.963 8.977,61.963 24.977,61.963 36.977,61.963 40.977,61.963 44.977,61.963 48.977,61.963 52.977,61.963 56.977,61.963 60.977,61.963 64.977,61.963 68.977,61.963 72.977,61.963 76.977,61.963 80.977,61.963 84.977,61.963 88.977,61.963 92.977,61.963 96.977,61.963 6.977,65.963 42.977,65.963 46.977,65.963 50.977,65.963 54.977,65.963 58.977,65.963 62.977,65.963 66.977,65.963 70.977,65.963 74.977,65.963 78.977,65.963 82.977,65.963 86.977,65.963 90.977,65.963 94.977,65.963 4.977,69.963 8.977,69.963 12.977,69.963 16.977,69.963 36.977,69.963 40.977,69.963 44.977,69.963 48.977,69.963 52.977,69.963 56.977,69.963 60.977,69.963 64.977,69.963 68.977,69.963 72.977,69.963 76.977,69.963 80.977,69.963 84.977,69.963 88.977,69.963 92.977,69.963 96.977,69.963 21.209,72.771 22.225,72.771 10.977,73.963 18.977,73.963 42.977,73.963 46.977,73.963 50.977,73.963 54.977,73.963 62.977,73.963 66.977,73.963 70.977,73.963 74.977,73.963 78.977,73.963 82.977,73.963 86.977,73.963
Net1X_1: 1X.1 R4.2 | length 58.1
  Top Layer w0.5: R4.2 45.055,12.071 ccw(c45.055,14.611) 46.851,12.815 63.772,29.736 cw(c65.568,27.94) 65.568,30.48 1X.1
Net10X_1: 10X.1 R3.2 | length 10.7
  Top Layer w0.5: R3.2 83.784,10.16 cw(c83.784,7.62) 85.58,9.416 85.616,9.38 ccw(c87.412,11.176) 87.412,8.636 10X.1
NetC4_1: C4.1 C5.1 C9.2 C10.2 CN1.1 CN2.2 L2.2 | length 17.9
  Top Layer w3: CN2.2 CN1.1
  other v1: 28.702,26.924 29.718,26.924 28.539,31.75 29.845,31.75 35.477,32.963 27.977,37.963 30.477,42.963 35.477,42.963 32.977,47.963 26.949,48.057 27.559,48.082 27.559,48.717 26.92,49.301 27.559,49.301 30.477,52.963 35.477,52.963 27.977,57.963 30.477,62.963 35.477,62.963 28.448,66.929 29.718,66.929 32.977,67.963 28.575,72.136 29.591,72.136
NetC4_2: C4.2 C5.2 CN1.2 L1.2 | length 7.7
  Top Layer w1: L1.2 29.083,70.273 ; C5.2 29.083,70.273 ; C4.2@29.083,70.604 29.083,70.273 ; CN1.2 29.083,70.273
NetC9_1: C9.1 C10.1 CN2.1 L3.2 | length 6.7
  Top Layer w1: L3.2 30.795,28.956 CN2.1
NetC15_2: C15.2 R8.2 R12.1 U1.2 | length 7.9
  Top Layer w0.4: C15.2 R8.2 R12.1 ccw(c24.948,11.049) 24.095,10.195 24.13,10.16 ccw(c25.356,11.386) 25.356,9.652 U1.2
NetC16_2: C16.2 R1.1 R5.2 U1.3 | length 9
  Top Layer w0.4: C16.2 R1.1 ; R5.2 R1.1 ; U1.3 23.586,8.382 ccw(c23.586,6.648) R1.1
NetCN3_1: CN3.1 R6.3 | length 0.3
  Top Layer w1.5: CN3.1 cw(c7.048,8.128) CN3.1@7.048,8.318
  other v1: 8.255,7.493 8.89,7.493 9.525,7.493 10.16,7.493 8.255,8.128 8.89,8.128 9.525,8.128 10.16,8.128 8.255,8.763 8.89,8.763 9.525,8.763 10.16,8.763
NetCN3_2: CN3.2 R6.1 | length 0.3
  Top Layer w1.5: CN3.2 ccw(c7.048,11.938) CN3.2@7.048,11.748
  other v1: 8.255,11.176 8.89,11.176 9.525,11.176 10.16,11.176 8.255,11.811 8.89,11.811 9.525,11.811 10.16,11.811 8.255,12.446 8.89,12.446 9.525,12.446 10.16,12.446
NetLED1_1: LED1.1 R10.1 | length 2.8
  Top Layer w0.4: LED1.1 5.834,53.84 R10.1
NetR2_1: R2.1 R4.1 R12.2 U1.6 | length 19.8
  Top Layer w0.5: R12.2 25.553,11.321 cw(c27.349,9.525) 27.349,12.065 28.286,12.065 cw(c28.286,9.525) 30.082,11.321 32.277,9.126 ccw(c34.073,10.922) 34.073,8.382 U1.6 38.779,8.382 ccw(c38.779,10.116) 40.005,8.89 ccw(c39.105,9.79) 40.378,9.79 R4.1
NetR2_2: R2.2 U2.3 | length 19.5
  Top Layer w0.5: R2.2 47.373,10.409 cw(c47.373,8.257) 48.895,9.779 49.548,9.126 ccw(c51.344,10.922) 51.344,8.382 U2.3
NetR3_1: R3.1 R7.2 R11.2 U2.6 | length 26.3
  Top Layer w0.5: R11.2 R7.2 60.67,12.573 cw(c60.67,10.033) 62.466,11.829 65.169,9.126 ccw(c66.965,10.922) 66.965,8.382 U2.6 74.894,8.382 ccw(c74.894,10.922) 76.69,9.126 76.98,9.416 cw(c78.776,7.62) 78.776,10.16 R3.1
NetR5_1: R5.1 R6.4 | length 5.6
  Top Layer w0.4: R6.4 17.089,8.318 18.212,9.441 R5.1
NetR6_2: R6.2 R8.1 | length 5.4
  Top Layer w0.4: R6.2 17.589,11.748 18.288,11.049 R8.1
NetR7_1: R7.1 R9.2 R11.1 U2.2 | length 8
  Top Layer w0.5: R9.2 R7.1 R11.1 ccw(c57.728,11.055) 56.865,10.191 57.023,10.033 ; 57.03,10.026 ccw(c57.673,10.67) 57.673,9.76 ; 57.673,9.752 U2.2@60.78,9.752
pads on no net: CN1.0 CN2.0 HOLE1.X HOLE3.X HOLE4.X HOLE5.X SW1.3 SW1.6 SW1.7 U1.1 U1.5 U1.8 U2.1 U2.5 U2.8

## Polygon pours and split planes (outlines as drawn)
NetC4_1 on Top Layer "Top Layer-No Net 1" (solid, pour order 0): 26.543,48.895 26.543,73.914 cw(c27.559,73.914) 27.559,74.93 34.925,74.93 cw(c34.925,73.66) 36.195,73.66 36.195,25.146 cw(c35.052,25.146) 35.052,24.003 27.559,24.003 cw(c27.559,25.146) 26.416,25.146
GND on Top Layer "Top Layer-No Net 1" (solid, pour order 8): 0.127,79.883 97.917,79.883 97.917,0 97.79,0.127 0.127,0.127
GND on Top Layer "Top Layer-GND" (solid, pour order 12): 17.087,13.313 17.272,13.236 17.43,13.114 17.552,12.956 17.629,12.771 17.636,12.716 17.639,12.716 17.688,12.706 17.738,12.703 17.816,12.687 17.864,12.671 17.913,12.661 17.958,12.639 18.006,12.623 18.047,12.595 18.092,12.573 18.159,12.529 18.196,12.496 18.238,12.468 18.255,12.449 18.275,12.434 18.69,12.019 19.824,12.019 19.879,12.09 20.037,12.212 20.222,12.289 20.42,12.315 21.22,12.315 21.418,12.289 21.603,12.212 21.761,12.09 21.883,11.932 21.96,11.747 21.986,11.549 21.986,10.549 21.96,10.351 21.883,10.166 21.761,10.008 21.603,9.886 21.418,9.809 21.22,9.783 20.42,9.783 20.222,9.809 20.037,9.886 19.879,10.008 19.824,10.079 18.288,10.079 18.263,10.083 18.238,10.081 18.189,10.091 18.139,10.094 18.061,10.11 18.013,10.126 18.004,10.128 17.964,10.136 17.919,10.158 17.871,10.174 17.83,10.202 17.785,10.224 17.762,10.239 17.718,10.268 17.711,10.275 17.681,10.301 17.639,10.329 17.622,10.348 17.602,10.363 17.497,10.469 17.43,10.382 17.272,10.26 17.087,10.183 16.889,10.157 14.479,10.157 14.281,10.183 14.096,10.26 13.938,10.382 13.816,10.54 13.739,10.725 13.713,10.923 13.713,12.573 13.739,12.771 13.816,12.956 13.938,13.114 14.096,13.236 14.281,13.313 14.479,13.339 16.889,13.339
GND on Top Layer "Top Layer-GND 1" (solid, pour order 14): 21.418,10.681 21.603,10.604 21.761,10.482 21.883,10.324 21.96,10.139 21.986,9.941 21.986,8.941 21.96,8.743 21.883,8.558 21.761,8.4 21.603,8.278 21.418,8.201 21.22,8.175 20.42,8.175 20.222,8.201 20.037,8.278 19.879,8.4 19.824,8.471 18.614,8.471 17.775,7.632 17.755,7.617 17.738,7.598 17.696,7.57 17.659,7.537 17.655,7.535 17.655,7.493 17.629,7.295 17.552,7.11 17.43,6.952 17.272,6.83 17.087,6.753 16.889,6.727 14.479,6.727 14.281,6.753 14.096,6.83 13.938,6.952 13.816,7.11 13.739,7.295 13.713,7.493 13.713,9.143 13.739,9.341 13.816,9.526 13.938,9.684 14.096,9.806 14.281,9.883 14.479,9.909 16.889,9.909 17.087,9.883 17.225,9.825 17.526,10.127 17.546,10.142 17.563,10.161 17.605,10.189 17.615,10.197 17.642,10.222 17.675,10.243 17.709,10.266 17.754,10.288 17.795,10.316 17.843,10.332 17.888,10.354 17.889,10.355 17.937,10.364 17.985,10.38 18.063,10.396 18.113,10.399 18.162,10.409 18.187,10.407 18.212,10.411 19.824,10.411 19.879,10.482 20.037,10.604 20.222,10.681 20.42,10.707 21.22,10.707
GND on Top Layer "Top Layer-GND 2" (solid, pour order 16): 92.683,32.399 92.983,32.36 93.176,32.308 93.456,32.192 93.556,32.134 93.629,32.092 93.869,31.908 94.011,31.766 94.195,31.526 94.253,31.426 94.295,31.353 94.411,31.073 94.462,30.88 94.502,30.58 94.502,30.38 94.462,30.08 94.411,29.887 94.295,29.607 94.237,29.507 94.195,29.434 94.011,29.194 93.869,29.052 93.629,28.868 93.529,28.81 93.456,28.768 93.176,28.652 92.983,28.601 92.683,28.561 92.483,28.561 92.183,28.601 91.99,28.652 91.71,28.768 91.61,28.826 91.537,28.868 91.297,29.052 91.155,29.194 90.971,29.434 90.956,29.46 65.573,29.46 65.272,29.43 64.987,29.343 64.724,29.203 64.49,29.011 47.593,12.113 47.575,12.091 47.551,12.072 47.531,12.05 47.197,11.765 47.147,11.732 47.1,11.694 46.725,11.465 46.671,11.44 46.618,11.41 46.213,11.242 46.155,11.226 46.098,11.205 45.671,11.102 45.612,11.096 45.553,11.084 45.115,11.049 45.085,11.051 45.055,11.047 45.027,11.05 42.875,11.05 42.859,11.03 42.701,10.908 42.516,10.831 42.318,10.805 41.518,10.805 41.32,10.831 41.135,10.908 40.977,11.03 40.855,11.188 40.778,11.373 40.752,11.571 40.752,12.571 40.778,12.769 40.855,12.954 40.977,13.112 41.135,13.234 41.32,13.311 41.518,13.337 42.318,13.337 42.516,13.311 42.701,13.234 42.859,13.112 42.875,13.092 45.05,13.092 45.351,13.121 45.636,13.208 45.899,13.348 46.133,13.54 63.03,30.438 63.048,30.46 63.072,30.479 63.092,30.501 63.426,30.786 63.476,30.819 63.523,30.857 63.898,31.086 63.953,31.111 64.005,31.141 64.41,31.309 64.468,31.325 64.525,31.346 64.952,31.449 65.011,31.455 65.07,31.468 65.508,31.502 65.538,31.5 65.568,31.504 65.597,31.501 90.956,31.501 90.971,31.526 91.155,31.766 91.297,31.908 91.537,32.092 91.637,32.15 91.71,32.192 91.99,32.308 92.183,32.36 92.483,32.399 92.683,32.399
GND on Top Layer "Top Layer-GND 3" (solid, pour order 18): 82.902,11.4 83.087,11.323 83.245,11.201 83.261,11.181 83.756,11.181 83.784,11.184 83.814,11.18 83.844,11.182 84.282,11.147 84.341,11.135 84.4,11.129 84.827,11.026 84.884,11.005 84.942,10.989 85.347,10.821 85.4,10.791 85.454,10.766 85.829,10.537 85.876,10.499 85.926,10.466 86.26,10.181 86.28,10.159 86.304,10.14 86.322,10.118 86.334,10.105 86.568,9.913 86.831,9.773 87.116,9.686 87.417,9.657 90.956,9.657 90.958,9.66 90.971,9.682 91.155,9.922 91.297,10.064 91.537,10.248 91.637,10.306 91.71,10.348 91.99,10.464 92.183,10.516 92.483,10.555 92.683,10.555 92.983,10.516 93.176,10.464 93.456,10.348 93.556,10.29 93.629,10.248 93.869,10.064 94.011,9.922 94.195,9.682 94.253,9.582 94.295,9.509 94.411,9.229 94.462,9.036 94.502,8.736 94.502,8.536 94.462,8.236 94.411,8.043 94.295,7.763 94.237,7.663 94.195,7.59 94.011,7.35 93.869,7.208 93.629,7.024 93.529,6.966 93.456,6.924 93.176,6.808 92.983,6.757 92.683,6.717 92.483,6.717 92.183,6.757 91.99,6.808 91.71,6.924 91.61,6.982 91.537,7.024 91.297,7.208 91.155,7.35 90.971,7.59 90.956,7.616 87.44,7.616 87.412,7.612 87.382,7.616 87.352,7.614 86.914,7.649 86.855,7.661 86.795,7.667 86.368,7.77 86.312,7.792 86.254,7.807 85.848,7.975 85.796,8.005 85.741,8.03 85.367,8.259 85.32,8.297 85.27,8.33 84.936,8.615 84.916,8.637 84.892,8.656 84.874,8.678 84.862,8.691 84.628,8.883 84.365,9.023 84.08,9.11 83.779,9.139 83.261,9.139 83.245,9.119 83.087,8.997 82.902,8.92 82.704,8.894 81.904,8.894 81.706,8.92 81.521,8.997 81.363,9.119 81.241,9.277 81.164,9.462 81.138,9.66 81.138,10.66 81.164,10.858 81.241,11.043 81.363,11.201 81.521,11.323 81.706,11.4 81.904,11.426 82.704,11.426
GND on Top Layer "Top Layer-GND 4" (solid, pour order 20): 42.516,11.649 42.701,11.572 42.859,11.451 42.875,11.43 47.322,11.43 47.373,11.436 47.411,11.432 47.448,11.433 47.919,11.386 47.992,11.369 48.067,11.357 48.519,11.22 48.588,11.189 48.658,11.162 49.075,10.939 49.136,10.896 49.2,10.856 49.566,10.556 49.591,10.528 49.621,10.505 49.653,10.465 50.266,9.851 50.5,9.659 50.763,9.519 51.048,9.432 51.349,9.403 59.368,9.403 59.403,9.414 59.448,9.437 59.498,9.446 59.545,9.463 59.682,9.49 59.757,9.495 59.831,9.504 61.731,9.504 61.805,9.495 61.88,9.49 62.017,9.463 62.064,9.446 62.114,9.437 62.159,9.414 62.206,9.398 62.248,9.37 62.293,9.348 62.409,9.271 62.446,9.238 62.488,9.21 62.521,9.172 62.559,9.139 62.587,9.097 62.62,9.06 62.697,8.944 62.719,8.899 62.747,8.857 62.763,8.81 62.786,8.765 62.795,8.715 62.812,8.668 62.839,8.531 62.842,8.481 62.852,8.432 62.849,8.382 62.852,8.332 62.842,8.283 62.839,8.233 62.812,8.096 62.795,8.049 62.786,7.999 62.763,7.954 62.747,7.907 62.719,7.865 62.697,7.82 62.62,7.704 62.587,7.667 62.559,7.625 62.521,7.592 62.488,7.554 62.446,7.526 62.409,7.493 62.293,7.416 62.248,7.394 62.206,7.366 62.159,7.35 62.114,7.327 62.064,7.318 62.017,7.301 61.88,7.274 61.805,7.269 61.731,7.26 59.831,7.26 59.757,7.269 59.682,7.274 59.545,7.301 59.498,7.318 59.448,7.327 59.403,7.35 59.368,7.361 51.372,7.361 51.344,7.358 51.314,7.362 51.284,7.36 50.846,7.395 50.787,7.407 50.728,7.413 50.301,7.516 50.244,7.537 50.186,7.553 49.781,7.721 49.728,7.751 49.674,7.776 49.299,8.005 49.252,8.043 49.202,8.076 48.868,8.361 48.848,8.383 48.824,8.402 48.806,8.424 48.19,9.04 48.001,9.196 47.805,9.3 47.594,9.365 47.349,9.389 42.875,9.389 42.859,9.368 42.701,9.246 42.516,9.17 42.318,9.144 41.518,9.144 41.32,9.17 41.135,9.246 40.977,9.368 40.855,9.526 40.778,9.711 40.752,9.909 40.752,10.909 40.778,11.107 40.855,11.292 40.977,11.451 41.135,11.572 41.32,11.649 41.518,11.675 42.318,11.675
GND on Top Layer "Top Layer-GND 5" (solid, pour order 22): 181 vertices, not listed, extent 56.881,7.26 81.93,13.839
GND on Top Layer "Top Layer-GND 6" (solid, pour order 26): 182 vertices, not listed, extent 24.115,7.26 41.544,13.337
NetC4_1 on Bottom Layer "Top Layer-No Net 1" (solid, pour order 6): 26.543,48.895 26.543,73.914 cw(c27.559,73.914) 27.559,74.93 34.925,74.93 cw(c34.925,73.66) 36.195,73.66 36.195,25.146 cw(c35.052,25.146) 35.052,24.003 27.559,24.003 cw(c27.559,25.146) 26.416,25.146
GND on Bottom Layer "Top Layer-No Net 1" (solid, pour order 10): 0.127,79.883 97.917,79.883 97.917,0 0.254,0 0.127,0.127

## Keep-outs
Keep-Out Layer:
  lines w0.254: 0,0 97.917,0 97.917,79.883 0.127,79.883 0.127,0.127

## Other copper
Top Layer:
  rectangle net NetCN3_2: 6.731,10.922 12.7,12.7
  rectangle net NetCN3_1: 6.604,7.112 12.7,9.017
  rectangle net -9VSW: 26.751,5.08 29.083,7.112
  rectangle net -9VSW: 59.644,5.207 61.976,7.239
Bottom Layer:
  rectangle net NetCN3_1: 6.604,7.112 10.541,9.017
  rectangle net NetCN3_2: 6.731,10.922 10.541,12.7

## Silkscreen, mask and mechanical layers (free items; w line width, h text height)
Top Overlay:
  drawing of 3319 lines, arcs and shapes, not listed
  text "ENG. FELIPE NAVARRO / MAY/2018" at 9.906,73.406 h2
  text "S/N:" at 87.758,63.881 h2
  text "Current Probe / Rev 3" at 6.715,37.44 h2
  text "100mA/V" at 87.272,35.726 h2
  text "-" at 7.696,18.288 h4 r180
  text "10mA/V" at 87.272,13.882 h2
  text "+" at 6.02,1.778 h4
Top Solder:
  region: 0.508,4.953 0.508,3.953 8.204,3.953 8.204,4.953
  region: 8.24,15.113 8.24,16.113 0.508,16.113 0.508,15.113
  rectangle: 18.795,16.51 43.795,17.51
  rectangle: 18.795,1.016 43.795,2.016
  rectangle: 18.795,1.016 19.795,8.65
  rectangle: 18.795,11.938 19.795,17.435
  rectangle: 42.798,1.143 43.798,9.271
  rectangle: 42.798,12.939 43.798,17.51
  rectangle: 54.229,1.016 74.422,2.016
  rectangle: 54.228,1.016 55.228,7.602
  rectangle: 54.228,9.253 55.228,17.526
  region: 74.295,17.526 54.229,17.526 54.229,16.526 74.295,16.526
  rectangle: 73.422,1.016 74.422,7.602
  rectangle: 73.405,9.253 74.405,17.526
BOARD OUTLINE:
  lines w0.254: 97.917,0 0,0 0,72.263 0,80 98,80 98,0

## Text inside footprints (layer, text, board x,y; h text height)
CN3: Top Overlay "2" at 8.509,13.716 h1.6 r270